# Altium PCB 显示与输入.PcbDoc
Units mm, origin at the board's own origin, x right, y up, seen from the top; angles counter-clockwise.
Board outline 158.95 x 128.7 mm, 2 copper layers (Top Layer, Bottom Layer); 63 components, 65 nets, 216 pads, 24 vias.
Unrouted connection lines stored in the file: 140.
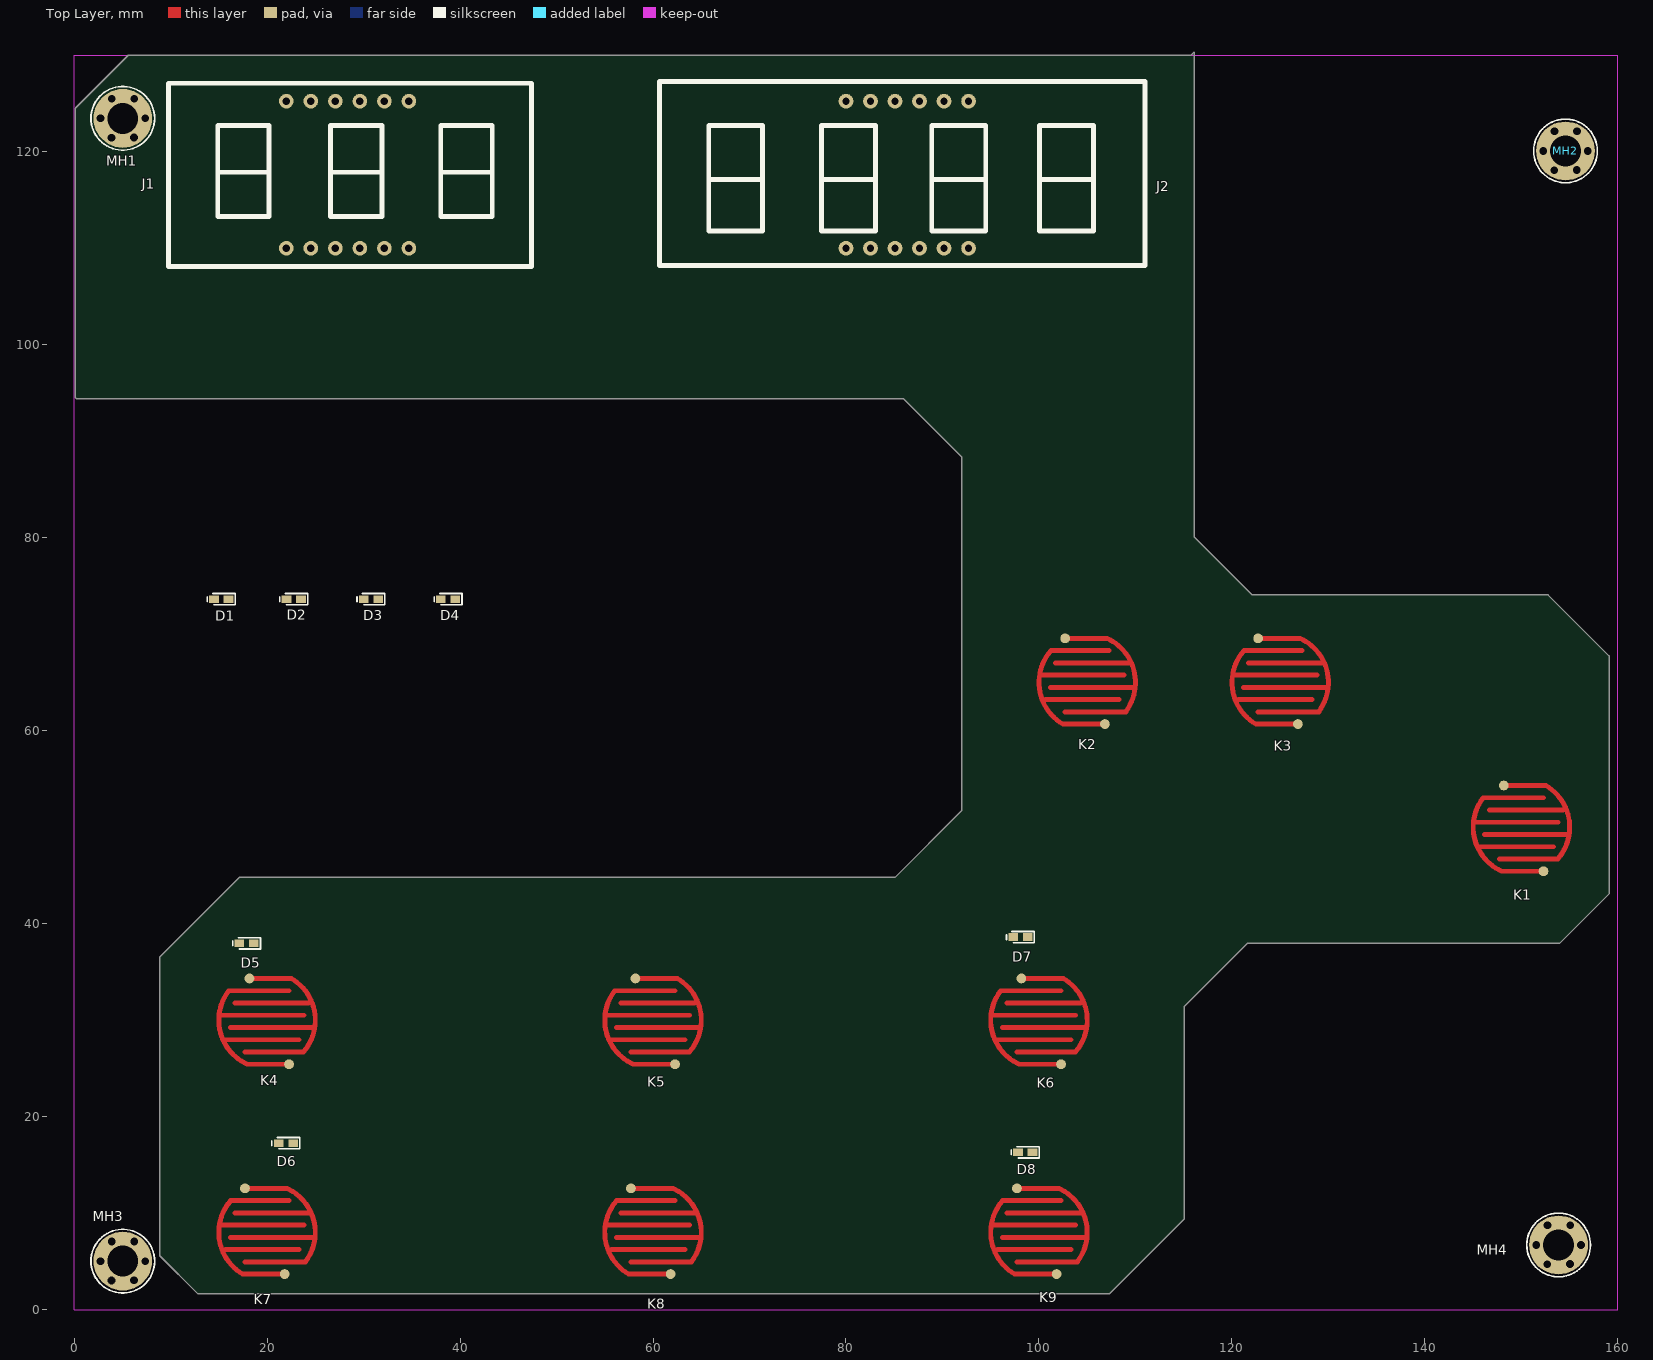
[diagram p0: Top Layer view]
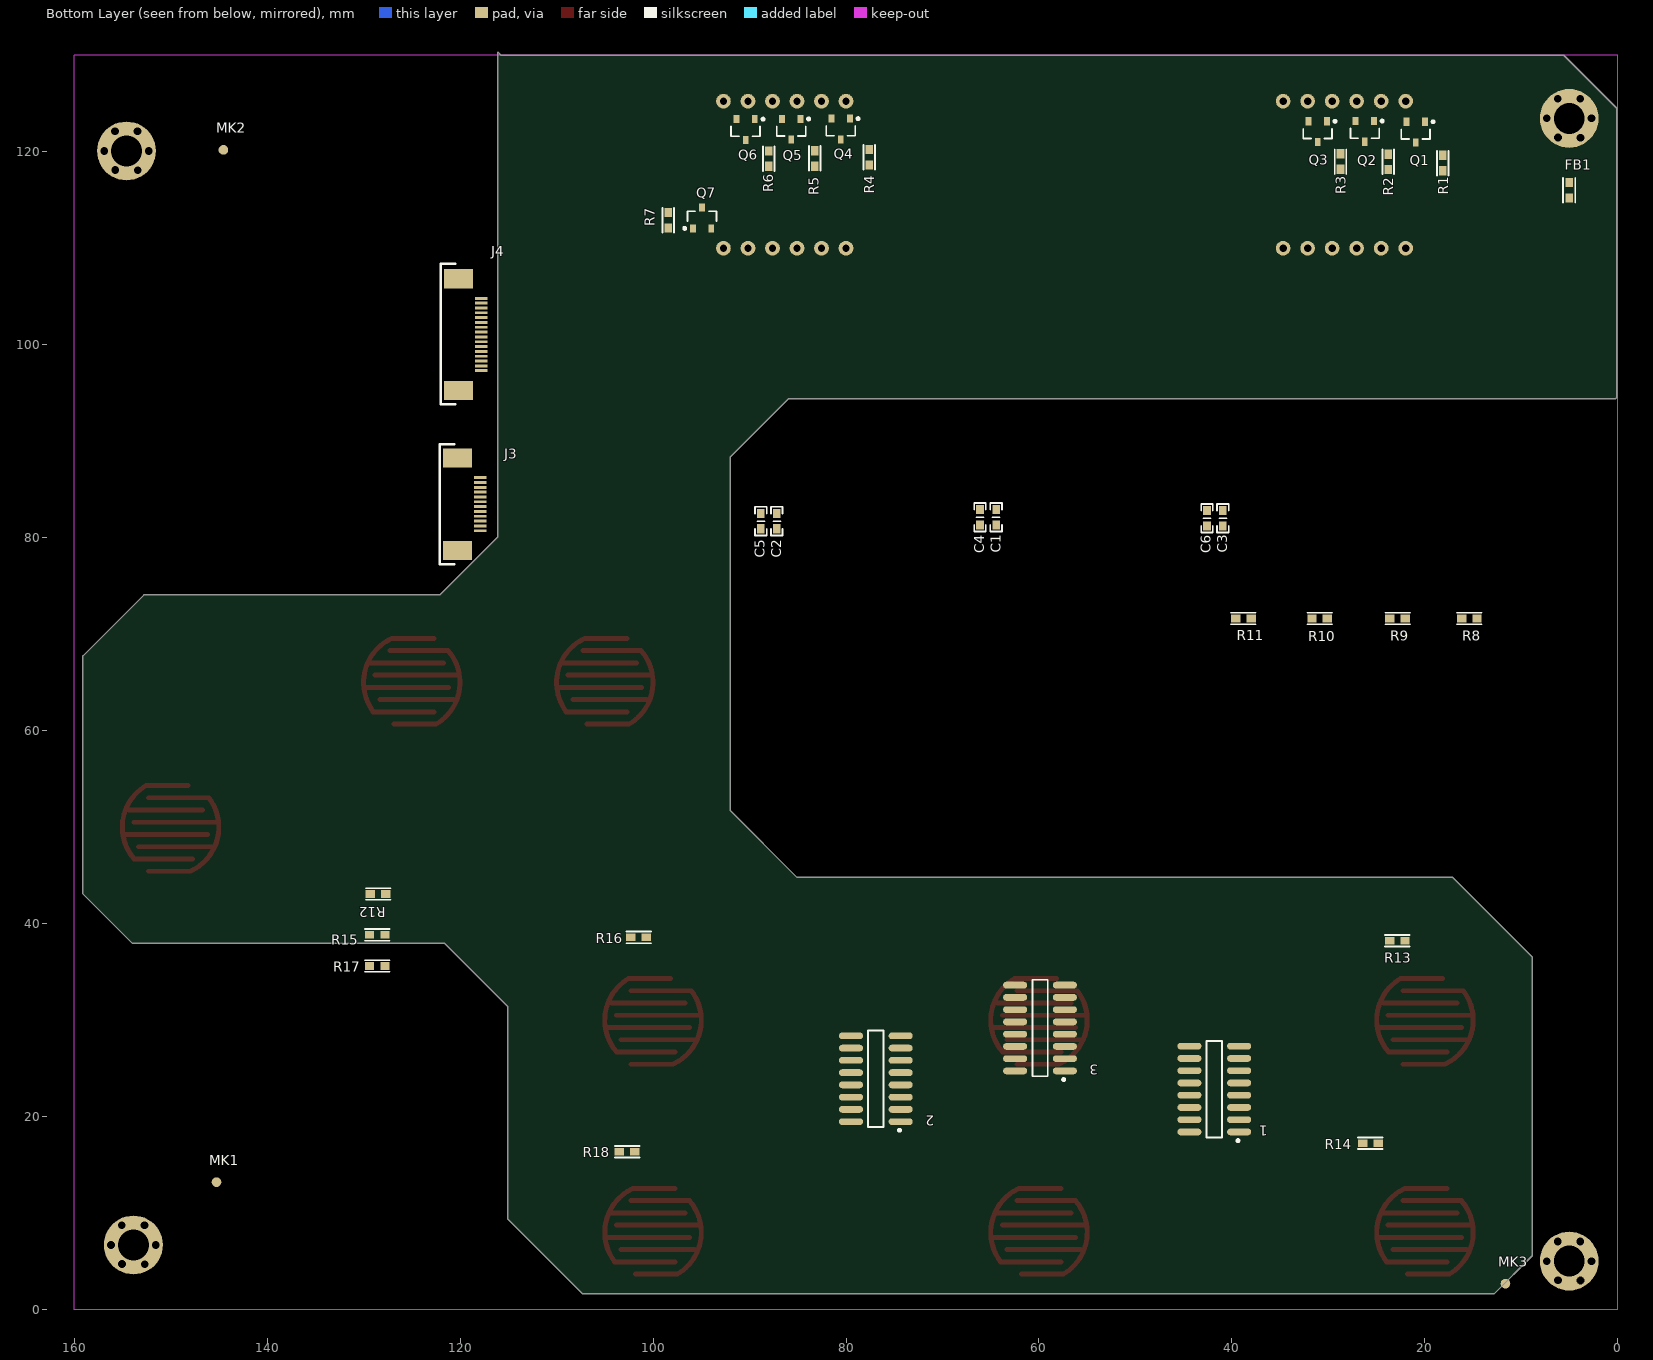
[diagram p1: Bottom Layer view, seen from below]

## Layer stack, top to bottom
Top Solder: solder mask 0.0102, Solder Resist, Dk 3.5
Top Layer: signal copper 0.0356
Dielectric 1: dielectric 0.32, FR-4, Dk 4.8
Bottom Layer: signal copper 0.0356
Bottom Solder: solder mask 0.0102, Solder Resist, Dk 3.5

## Board outline
8.89,5.588 12.852,1.626 107.29,1.626 115.037,9.373 115.037,31.394 121.59,37.948 153.949,37.948 159.08,43.078 159.08,67.742 152.756,74.066 122.098,74.066 116.078,80.086 116.078,130.327 115.748,129.997 5.613,129.997 0.127,124.511 0.127,94.539 0.279,94.386 85.979,94.386 91.999,88.367 91.999,51.714 85.115,44.831 17.17,44.831 8.89,36.551

## Design rules (kind name [scope] priority, off if disabled: settings)
AcuteAngle [All] p1: minimum=4.50000000000000E+0001 checktracksonly=TRUE // 默认角
Clearance Clearance_MK [(Component Like 'MK*')] p1: gap=0.508
Clearance Clearance_keep [InPolygon vs OnLayer('Keep-Out Layer')] p2: gap=0.508
Clearance Clearance_MH [InPolygon vs HasFootprint('AS_D3mm-6mm')] p3: gap=0.635
Clearance Clearance_poly [InPolygon] p4: gap=0.381 // 更改敷铜间距设置，默认20mil
Clearance Clearance_via_all [isvia] p5: gap=0.178 // 过孔安全间距设置，默认7mil
Clearance Clearance_pad_all [ispad] p6: gap=0.178 // 焊盘安全间距设置，默认7mil
Clearance Clearance_All [All] p7: gap=0.178 // 全局安全间距设置，默认7mil
ComponentClearance [All] p1: gap=0.102 collisioncheckmode=3 verticalgap=0.102 showdistances=FALSE
DiffPairsRouting DiffPairsRouting_all [(InDifferentialPairClass('All Differential Pairs'))] p1: maxlimit=0.178 minlimit=0.178 mostfreqgap=0.178 toplayer_minwidth=0.381 toplayer_maxwidth=0.381 toplayer_prefwidth=0.381 bottomlayer_minwidth=0.381 bottomlayer_maxwidth=0.381 bottomlayer_prefwidth=0.381 maxuncoupledlength=12.7 // 更改差分在每层
HoleSize [All] p1: absolutevalues=TRUE maxlimit=10 minlimit=0.025 maxpercent=80.000 minpercent=20.000
HoleToHoleClearance [All] p1: gap=0.102 allowstackedmicrovias=TRUE
Length [All] p1: maxlimit=2539.975 minlimit=0
MatchedLengths DiffPair_MatchedLengths [InDifferentialPair ('RXIN1') Or InDifferentialPair ('RXIN2') Or InDifferentialPair ('RXIN0') Or InDifferentialPair ('RXCLK')] p1: tolerance=2.54 checknetsindiffpair=TRUE checkdiffpairvsdiffpair=FALSE checkxsignals=FALSE checkothers=FALSE
MinimumSolderMaskSliver [All] p1: minsoldermaskwidth=0.102
PlaneClearance PlaneClearance_via [isvia] p1: clearance=0.508 // 过孔在Plane层的隔离大小设置，在过孔密
PlaneClearance PlaneClearance_all [All] p2: clearance=0.508
PlaneConnect PlaneConnect_via [isvia] p1: planeconnectstyle=Direct reliefexpansion=0.508 reliefentries=4 reliefconductorwidth=0.254 reliefairgap=0.254 // 电源地在plane层过孔全连接
PlaneConnect PlaneConnect_all [All] p2: planeconnectstyle=Relief reliefexpansion=0.508 reliefentries=4 reliefconductorwidth=0.254 reliefairgap=0.254
PolygonConnect PolygonConnect_DGND [InNet('DGND')] p1: connectstyle=Relief reliefconductorwidth=0.508 reliefentries=4 polygonreliefangle="90 Angle" airgapwidth=0.254
PolygonConnect PolygonConnect_via [isvia] p2: connectstyle=Direct reliefconductorwidth=0.254 reliefentries=4 polygonreliefangle="90 Angle" airgapwidth=0.254 // 敷铜过孔全连接
PolygonConnect PolygonConnect_AGND [InNet('AGND')] p3: connectstyle=Relief reliefconductorwidth=0.508 reliefentries=4 polygonreliefangle="90 Angle" airgapwidth=0.254 // 敷铜过孔全连接
PolygonConnect PolygonConnect_all [All] p4: connectstyle=Direct reliefconductorwidth=0.254 reliefentries=4 polygonreliefangle="90 Angle" airgapwidth=0.254
RoutingCorners [All] p1: cornerstyle=45-Degree minsetback=1.27 maxsetback=1.27
RoutingVias RoutingVias_all [All] p1: holewidth=0.35 width=0.7 viastyle="Through Hole" minholewidth=0.35 minwidth=0.7 maxholewidth=0.9 maxwidth=1.27 // 更改过孔设置，默认最小12/24mil 最大20/40mil
SMDNeckDown [All] p1: percent=200.000
ShortCircuit [(Component Like 'MH*') vs InNet('No Net') and isvia] p1: allowed=TRUE
SilkToSilkClearance [All] p1: silktosilkclearance=0.102
SilkToSolderMaskClearance SilkscreenOverComponentPads [IsPad] p1: minsilkscreentomaskgap=0.102 clearancetoexposedcopper=TRUE
SolderMaskExpansion [All] p1: expansion=0.102
Width Width_all [All] p1: maxlimit=2.54 minlimit=0.178 preferedwidth=0.178
19 further rules are at their usual default settings.

## Components (designator, comment, footprint, x,y, rotation, side; value= is the part's Value field where it differs from the comment)
1 "74HC595" SOIC-16 41.834,22.86 r0 bottom
2 "74HC595" SOIC-16 76.911,23.927 r0 bottom
3 "74HC595" SOIC-16 59.893,29.185 r0 bottom
C1 "100nf" Cap0603 64.44,82.118 r90 bottom
C2 "100nf" Cap0603 87.173,81.712 r90 bottom
C3 "100nf" Cap0603 40.945,82.017 r90 bottom
C4 "10uf/16V" Cap0603 66.116,82.118 r90 bottom
C5 "10uf/16V" Cap0603 88.824,81.712 r90 bottom
C6 "10uf/16V" Cap0603 42.596,82.017 r90 bottom
D1 "LED" LED0603 15.4,73.631 r180 top
D2 "LED" LED0603 22.913,73.631 r180 top
D3 "LED" LED0603 30.913,73.631 r180 top
D4 "LED" LED0603 38.913,73.631 r180 top
D5 "LED" LED0603 18.034,37.968 r180 top
D6 "LED" LED0603 22.098,17.247 r180 top
D7 "LED" LED0603 98.222,38.608 r180 top
D8 "LED" LED0603 98.73,16.307 r180 top
FB1 "0R" FB0603 5.055,116.002 r90 bottom
J1 "DPY-3CA" 3位数码管0.56寸 22,110 r0 top
J2 "DPY-4CA" 4位数码管0.56寸 80,110 r0 top
J3 "FPC12-0.5" FPC0.5-12P 119.101,83.464 r90 bottom
J4 "FPC16_0.5" FPC0.5-16P 119.888,100.94 r90 bottom
K1 "SW-PB" PCB-KEY#1 150,50 r270 top
K2 "SW-PB" PCB-KEY#2 105,65 r90 top
K3 "SW-PB" PCB-KEY#3 125,65 r90 top
K4 "SW-PB" PCB-KEY#4 20,30 r270 top
K5 "SW-PB" PCB-KEY#3 60,30 r270 top
K6 "SW-PB" PCB-KEY#1 100,30 r270 top
K7 "SW-PB" PCB-KEY#3 20,8 r90 top
K8 "SW-PB" PCB-KEY#3 60,8 r90 top
K9 "SW-PB" PCB-KEY#2 100,8 r90 top
MH1 "MH" AS_D3mm-6mm 5.051,123.458 r0 top
MH2 "MH" AS_D3mm-6mm 154.563,120.08 r0 top
MH3 "MH" AS_D3mm-6mm 5.051,5.025 r0 top
MH4 "MH" AS_D3mm-6mm 153.852,6.702 r0 top
MK1 "Mark" MK 145.237,13.208 r180 bottom
MK2 "Mark" MK 144.526,120.193 r90 bottom
MK3 "Mark" MK 11.659,2.692 r90 bottom
Q1 "S8550" SOT-23B 20.955,122.022 r270 bottom
Q2 "S8550" SOT-23B 26.238,122.098 r270 bottom
Q3 "S8550" SOT-23B 31.115,122.072 r270 bottom
Q4 "S8550" SOT-23B 80.543,122.352 r270 bottom
Q5 "S8550" SOT-23B 85.674,122.326 r270 bottom
Q6 "S8550" SOT-23B 90.399,122.301 r270 bottom
Q7 "S8550" SOT-23B 94.92,113.132 r90 bottom
R1 "1K,5%" Res0603 18.161,118.821 r90 bottom
R2 "1K,5%" Res0603 23.8,118.948 r90 bottom
R3 "1K,5%" Res0603 28.753,118.974 r90 bottom
R4 "1K,5%" Res0603 77.597,119.431 r90 bottom
R5 "1K,5%" Res0603 83.236,119.304 r90 bottom
R6 "1K,5%" Res0603 88.011,119.278 r90 bottom
R7 "1K,5%" Res0603 98.425,112.903 r270 bottom
R8 "1K,5%" Res0603 15.4,71.631 r0 bottom
R9 "1K,5%" Res0603 22.835,71.631 r0 bottom
R10 "1K,5%" Res0603 30.912,71.631 r0 bottom
R11 "1K,5%" Res0603 38.811,71.631 r0 bottom
R12 "10K,5%" Res0603 128.499,43.078 r0 bottom
R13 "1K,5%" Res0603 22.86,38.227 r0 bottom
R14 "1K,5%" Res0603 25.654,17.247 r180 bottom
R15 "10K,5%" Res0603 128.575,38.837 r180 bottom
R16 "1K,5%" Res0603 101.498,38.583 r180 bottom
R17 "10K,5%" Res0603 128.575,35.611 r180 bottom
R18 "1K,5%" Res0603 102.692,16.358 r180 bottom

## Footprints (in the part's own frame and the unit in brackets; to place one, negate y for a bottom-side part, rotate by r counter-clockwise, add the part's x,y. Pads: shape width x height; smd on the part's side, far side on the other; paste and mask are expansions set on the pad)
3位数码管0.56寸 [mil]
  round 60 hole 30: 1(0,0) 2(100,0) 3(200,0) 4(300,0) 5(400,0) 6(500,0) 7(500,600) 8(400,600) 9(300,600) 10(200,600) 11(100,600) 12(0,600)
  silkscreen extent -480,-75 1000,673
4位数码管0.56寸 [mil]
  round 60 hole 30: 1(0,0) 2(100,0) 3(200,0) 4(300,0) 5(400,0) 6(500,0) 7(500,600) 8(400,600) 9(300,600) 10(200,600) 11(100,600) 12(0,600)
  silkscreen extent -760,-70 1220,680
AS_D3mm-6mm [mm] "内径3mm，外径7mm"
  round 6.1 hole 3.2: MH1(0,0)
  silkscreen extent -3.3,-3.3 3.3,3.3
Cap0603 [mm] "0603电容"
  rect 0.965x0.8 smd: 1(-0.8,0) 2(0.8,0)
  silkscreen extent -1.48,-0.6 1.48,0.6
FB0603 [mm] "0603磁珠"
  rect 0.965x0.8 smd: 1(-0.8,0) 2(0.8,0)
  silkscreen extent -1.27,-0.64 1.27,0.64
FPC0.5-12P [mm] "FPC0.5-12P;0.5mm;"
  rect 0.3x1.3 smd mask+0.051: 1(-2.744,-1.175) 2(-2.244,-1.175) 3(-1.744,-1.175) 4(-1.244,-1.175) 5(-0.744,-1.175) 6(-0.244,-1.175) 7(0.256,-1.175) 8(0.756,-1.175) 9(1.256,-1.175) 10(1.756,-1.175) 11(2.256,-1.175) 12(2.756,-1.175)
  rect 2x3 smd mask+0.051: 13(-4.787,1.175) 14(4.788,1.175)
  silkscreen extent -6.2,1.5 6.2,3
FPC0.5-16P [mm] "FPC0.5-16P;0.5mm"
  rect 0.3x1.3 smd mask+0.051: 1(-3.633,-2.081) 2(-3.133,-2.081) 3(-2.633,-2.081) 4(-2.133,-2.081) 5(-1.633,-2.081) 6(-1.133,-2.081) 7(-0.633,-2.081) 8(-0.133,-2.081) 9(0.367,-2.081) 10(0.867,-2.081) 11(1.367,-2.081) 12(1.867,-2.081) 13(2.367,-2.081) 14(2.867,-2.081) 15(3.367,-2.081) 16(3.867,-2.081)
  rect 2x3 smd mask+0.051: 17(-5.676,0.268) 18(5.91,0.269)
  silkscreen extent -7.09,0.59 7.47,2.09
LED0603 [mm]
  rect 1x0.8 smd: A(-0.6,0) K(0.9,0)
  silkscreen extent -1.3,-0.58 1.6,0.58
MK [mm] "贴片Mark点"
  round 1 smd mask+0.5: MK(0,0)
PCB-KEY#1 [mil]
  round 40 smd: 1(-169.96,-72) 2(179.96,90)
  Top Layer lines w20: -20,-190 -20,150 ; 80,-180 80,-179.86 ; -118.11,-157.48 ccw(c0,0) 80,-179.86 ; -120,-157.48 -120,90 ; 30,-150 30,190 ; -70,-130 -70,170 ; 130,-90 130,148.76 ; -169.96,-72 -169.96,-70.77 -169.88,97.95 ; 179.96,90 179.88,-79.95 ; -169.67,99.81 cw(c0,0) 128.92,148.76 ; 80,130 80,-179.86 ; 80,-179.86 ccw(c0,0) 179.88,-79.95 ; 179.88,-79.95 179.88,-79.95
PCB-KEY#2 [mil]
  round 40 smd: 1(-169.96,-72) 2(179.96,90)
  Top Layer lines w20: 30,190 30,-150 ; -70,170 -70,-130 ; -20,150 -20,-190 ; 128.92,148.76 ccw(c0,0) -169.67,99.81 ; 130,148.76 130,-90 ; 80,130 80,-179.86 ; -169.88,97.95 -169.96,-72 ; -120,90 -120,-157.48 ; 179.96,90 179.96,89.56 179.88,-79.95 ; -118.11,-157.48 ccw(c0,0) 80,-179.86 ; 80,-180 80,-179.86 ; 179.88,-79.95 cw(c0,0) 80,-179.86 ; 179.88,-79.95 179.88,-79.95
PCB-KEY#3 [mil]
  round 40 smd: 1(-169.96,-72) 2(179.96,90)
  Top Layer lines w20: 30,190 30,-150 ; -70,170 -70,-130 ; -20,150 -20,-190 ; 128.92,148.76 ccw(c0,0) -169.67,99.81 ; 130,148.76 130,-90 ; 80,130 80,-179.86 ; -169.88,97.95 -169.96,-72 ; -120,90 -120,-157.48 ; 179.96,90 179.88,-79.95 ; -118.11,-157.48 ccw(c0,0) 80,-179.86 ; 80,-180 80,-179.86 ; 179.88,-79.95 cw(c0,0) 80,-179.86 ; 179.88,-79.95 179.88,-79.95
PCB-KEY#4 [mil]
  round 40 smd: 1(-169.96,-72) 2(179.96,90)
  Top Layer lines w20: -20,-190 -20,150 ; 80,-180 80,-179.86 ; -118.11,-157.48 ccw(c0,0) 80,-179.86 ; -120,-157.48 -120,90 ; 30,-150 30,190 ; -70,-130 -70,170 ; 130,-90 130,148.76 ; -169.96,-72 -169.96,-71.92 -169.88,97.95 ; 179.96,90 179.96,89.2 ; -169.67,99.81 cw(c0,0) 128.92,148.76 ; 80,130 80,-179.86 ; 80,-179.86 ccw(c0,0) 179.88,-79.95 ; 179.88,-79.95 179.88,-79.95 ; 179.88,-79.95 179.96,89.2 ; 179.96,89.2 179.96,89.2
Res0603 [mm] "0603电阻"
  rect 0.965x0.8 smd: 1(-0.8,0) 2(0.8,0)
  silkscreen extent -1.28,-0.6 1.28,0.6
SOIC-16 [mm]
  oval 2.5x0.7 smd: 1(-2.577,4.445) 2(-2.577,3.175) 3(-2.577,1.905) 4(-2.577,0.635) 5(-2.577,-0.635) 6(-2.577,-1.905) 7(-2.577,-3.175) 8(-2.577,-4.445) 9(2.577,-4.445) 10(2.577,-3.175) 11(2.577,-1.905) 12(2.577,-0.635) 13(2.577,0.635) 14(2.577,1.905) 15(2.577,3.175) 16(2.577,4.445)
  silkscreen extent -2.57,-5 0.8,5.47, body extent -2.88,-4.92 2.92,4.88, height 1.75
SOT-23B [mm] "SOT23, 3-Leads, Body 2.9x1.3mm, Pitch 0.95mm, Lead Span 2.4mm, IPC High Density"
  rect 0.85x0.6 smd: 1(-1.075,0.95) 2(-1.075,-0.95) 3(1.075,0)
  silkscreen extent -1.2,-1.5 0.7,1.92, body extent -0.7,-1.5 0.7,1.5, height 1.14

## Part data
C1 C2 C3 C4 C5 C6: library part "Cap Semi", "无极性电容（表贴）"
FB1: library part FerriteBead, "磁珠"
J1: "共阳3位数码管"
J2: "共阳4位数码管"
MH1 MH2 MH3 MH4: "固定孔"
MK1 MK2 MK3: "贴片马克点"
Q1 Q2 Q3 Q4 Q5 Q6 Q7: "PNP"
R1 R2 R3 R4 R5 R6 R7 R8 R9 R10 R11 R12 R13 R14 R15 R16 R17 R18: library part Res, "电阻"

## Via types
v1: diameter 1.2, hole 0.8, Top Layer to Bottom Layer, tented both sides, 24 vias

## Nets (pads, with @x,y where several pads share a name; then routed paths per layer and width w, separated by ;. In a path a pad name is that pad's centre, name@x,y a point inside that pad or via, vN(x,y) a via of type N, cw(c..) or ccw(c..) an arc to the next point about the centre after c; other vN are vias at no path point)
A: 1.15 J1.11 J2.11
A0: J3.10 K1.2 K4.2 K7.2
A1: J3.9 K2.2 K5.2 K8.2
A8: J3.8 K3.2 K6.2 K9.2
A15: J3.7
B: 1.1 J1.7 J2.7
C: 1.2 J1.4 J2.4
D: 1.3 J1.2 J2.2
D1: J1.12 Q1.2
D2: J1.9 Q2.2
D3: J1.8 Q3.2
D4: J2.12 Q4.2
D5: J2.9 Q5.2
D6: J2.8 Q6.2
D7: J2.6 Q7.2
DC3V3: 1.10 1.16 2.10 2.16 3.10 3.16 C1.2 C2.2 C3.2 C4.2 C5.2 C6.2 J3.11 J3.12 J4.1 J4.2 J4.3 Q1.3 Q2.3 Q3.3 Q4.3 Q5.3 Q6.3 Q7.3 R8.1 R9.1 R10.1 R11.1 R12.1 R13.1 R14.1 R15.1 R16.1 R17.1 R18.1
DGND: 1.8 1.13 2.8 2.13 3.8 3.13 C1.1 C2.1 C3.1 C4.1 C5.1 C6.1 FB1.1 J3.1 J3.2 J3.13 J3.14 J4.13 J4.14 J4.15 J4.16 J4.17 J4.18
DS1: 1.14 J4.5
DS2: 2.14 J4.8
DS3: 3.14 J4.11
E: 1.4 J1.1 J2.1
F: 1.5 J1.10 J2.10
G: 1.6 J1.5 J2.5
H: 1.7 J1.3 J2.3
LED0: 3.15 D1.K
LED1: 3.1 D2.K
LED2: 3.2 D3.K
LED3: 3.3 D4.K
LED4: 3.4 D5.K
LED5: 3.5 D6.K
LED6: 3.6 D7.K
LED7: 3.7 D8.K
NetD1_A: D1.A R8.2
NetD2_A: D2.A R9.2
NetD3_A: D3.A R10.2
NetD4_A: D4.A R11.2
NetD5_A: D5.A R13.2
NetD6_A: D6.A R14.2
NetD7_A: D7.A R16.2
NetD8_A: D8.A R18.2
NetFB1_2: FB1.2 MH1.MH1
  other v1: 3.882,121.452 6.219,121.477 2.736,123.458 7.365,123.458 3.908,125.49 6.246,125.492
NetQ1_1: Q1.1 R1.2
NetQ2_1: Q2.1 R2.2
NetQ3_1: Q3.1 R3.2
NetQ4_1: Q4.1 R4.2
NetQ5_1: Q5.1 R5.2
NetQ6_1: Q6.1 R6.2
NetQ7_1: Q7.1 R7.2
PC4: J3.6 K1.1 K2.1 K3.1 R12.2
PC5: J3.5 K4.1 K5.1 K6.1 R15.2
PC6: J3.4 K7.1 K8.1 K9.1 R17.2
PC7: J3.3
SHCP1: 1.11 J4.4
SHCP2: 2.11 J4.7
SHCP3: 3.11 J4.10
STCP1: 1.12 J4.6
STCP2: 2.12 J4.9
STCP3: 3.12 J4.12
WEI1: 2.1 R1.1
WEI2: 2.2 R2.1
WEI3: 2.3 R3.1
WEI4: 2.4 R4.1
WEI5: 2.5 R5.1
WEI6: 2.6 R6.1
WEI7: 2.7 R7.1
pads on no net: 1.9 2.9 2.15 3.9 J1.6 MH2.MH1 MH3.MH1 MH4.MH1 MK1.MK MK2.MK MK3.MK
copper on no net:
  other v1: 3.882,3.019 6.219,3.044 152.684,4.695 155.02,4.721 2.736,5.025 7.365,5.025 151.537,6.702 156.167,6.702 3.908,7.057 6.246,7.059 152.709,8.734 155.047,8.735 153.395,118.073 155.732,118.099 152.249,120.08 156.878,120.08 153.42,122.112 155.759,122.114

## Keep-outs
Keep-Out Layer:
  lines w0.1: 0,0 0,130 160,130 160,0 0,0

## Silkscreen, mask and mechanical layers (free items; w line width, h text height)
Mechanical 15:
  the board outline again, w0.254